# EAGLE board Proiect-TSC-brd_v37 (EAGLE 9.7.0)
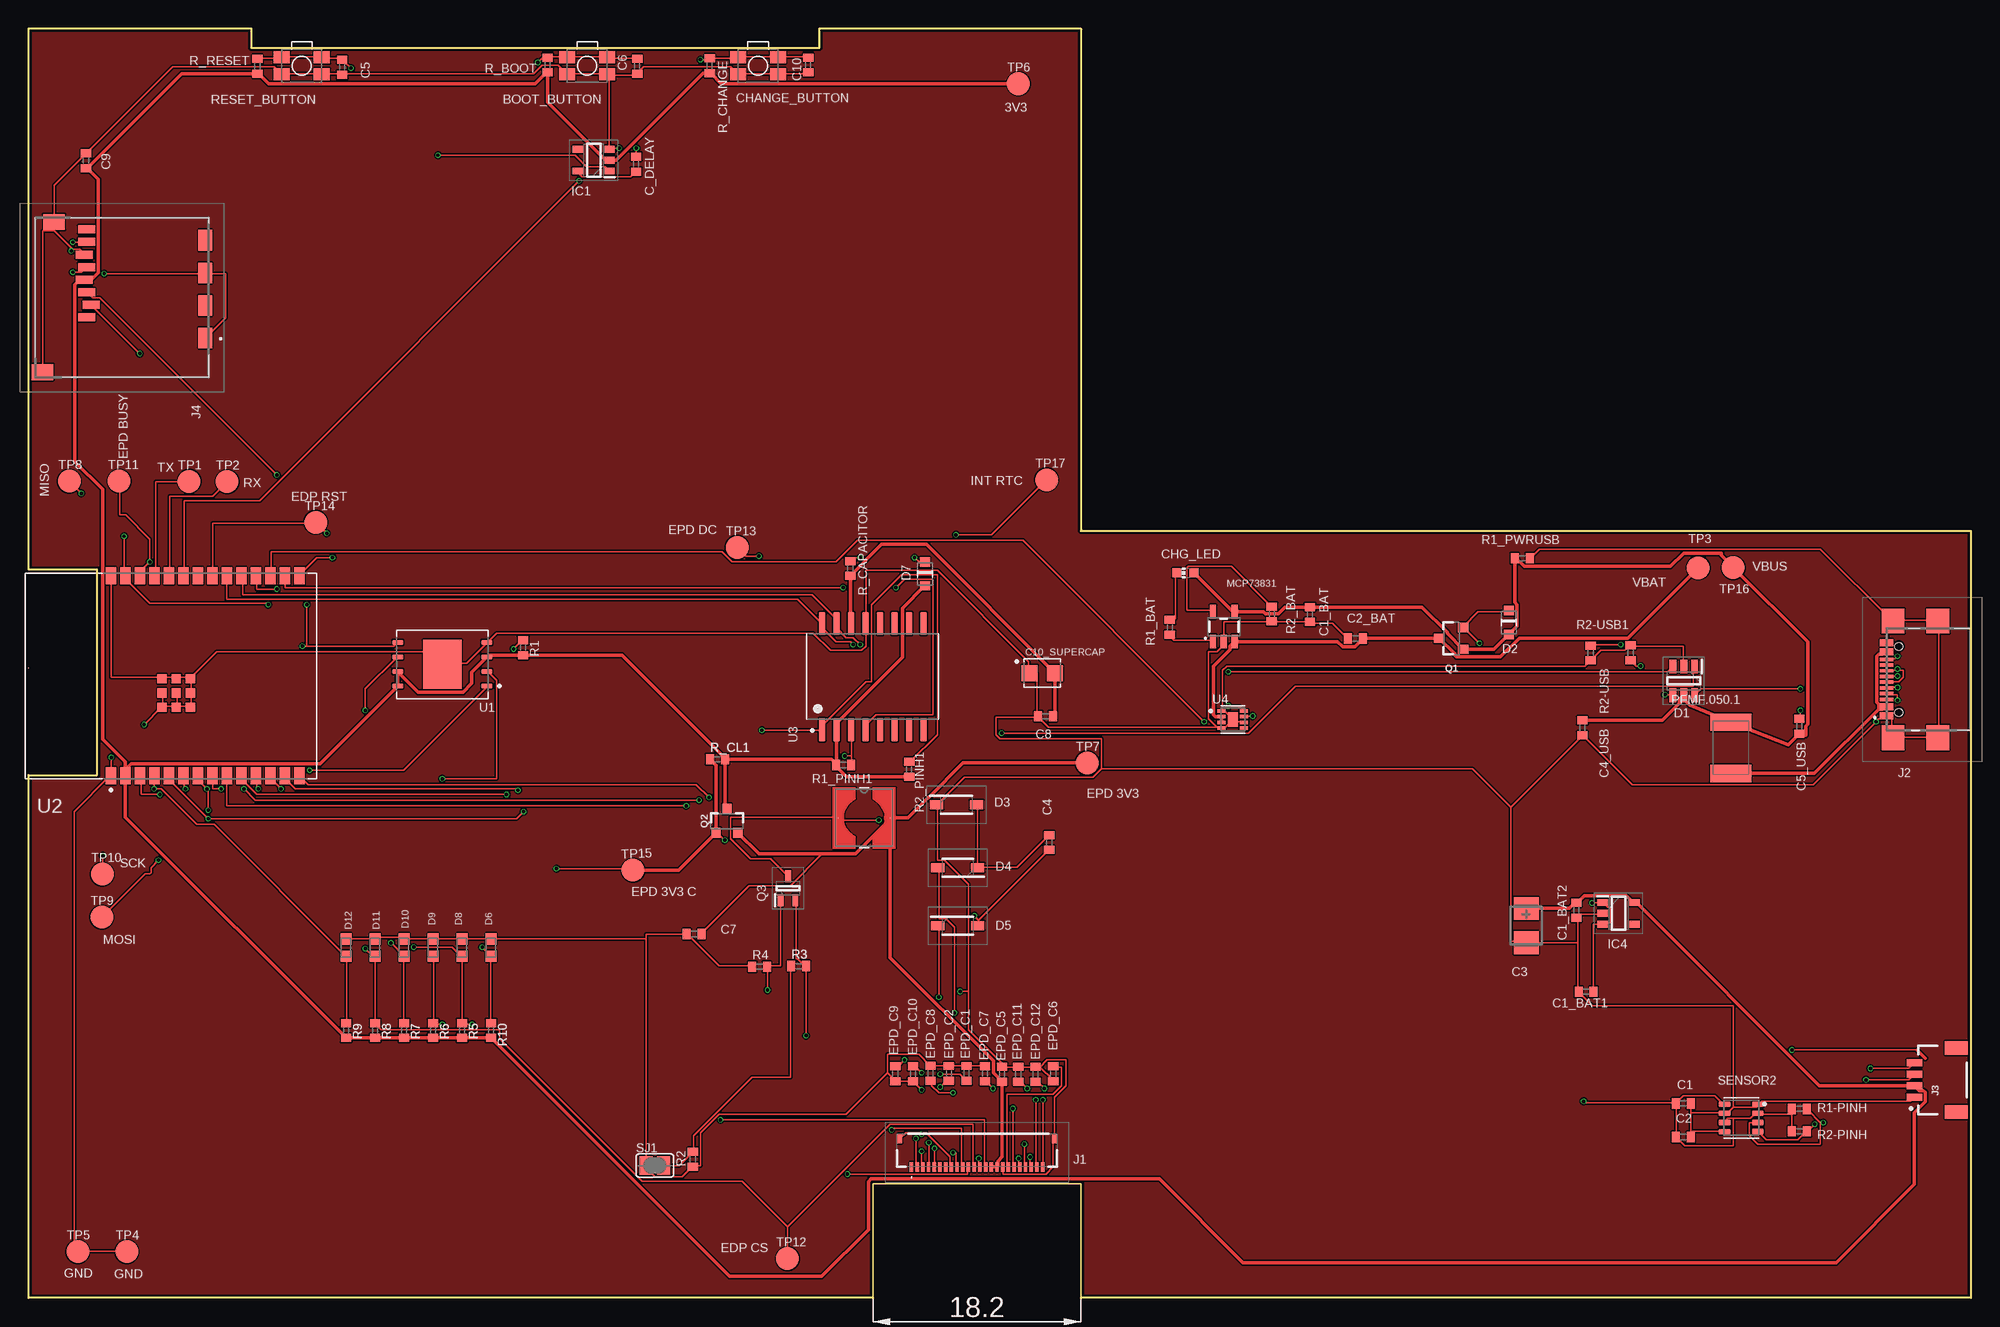
[diagram p0: board, top side]
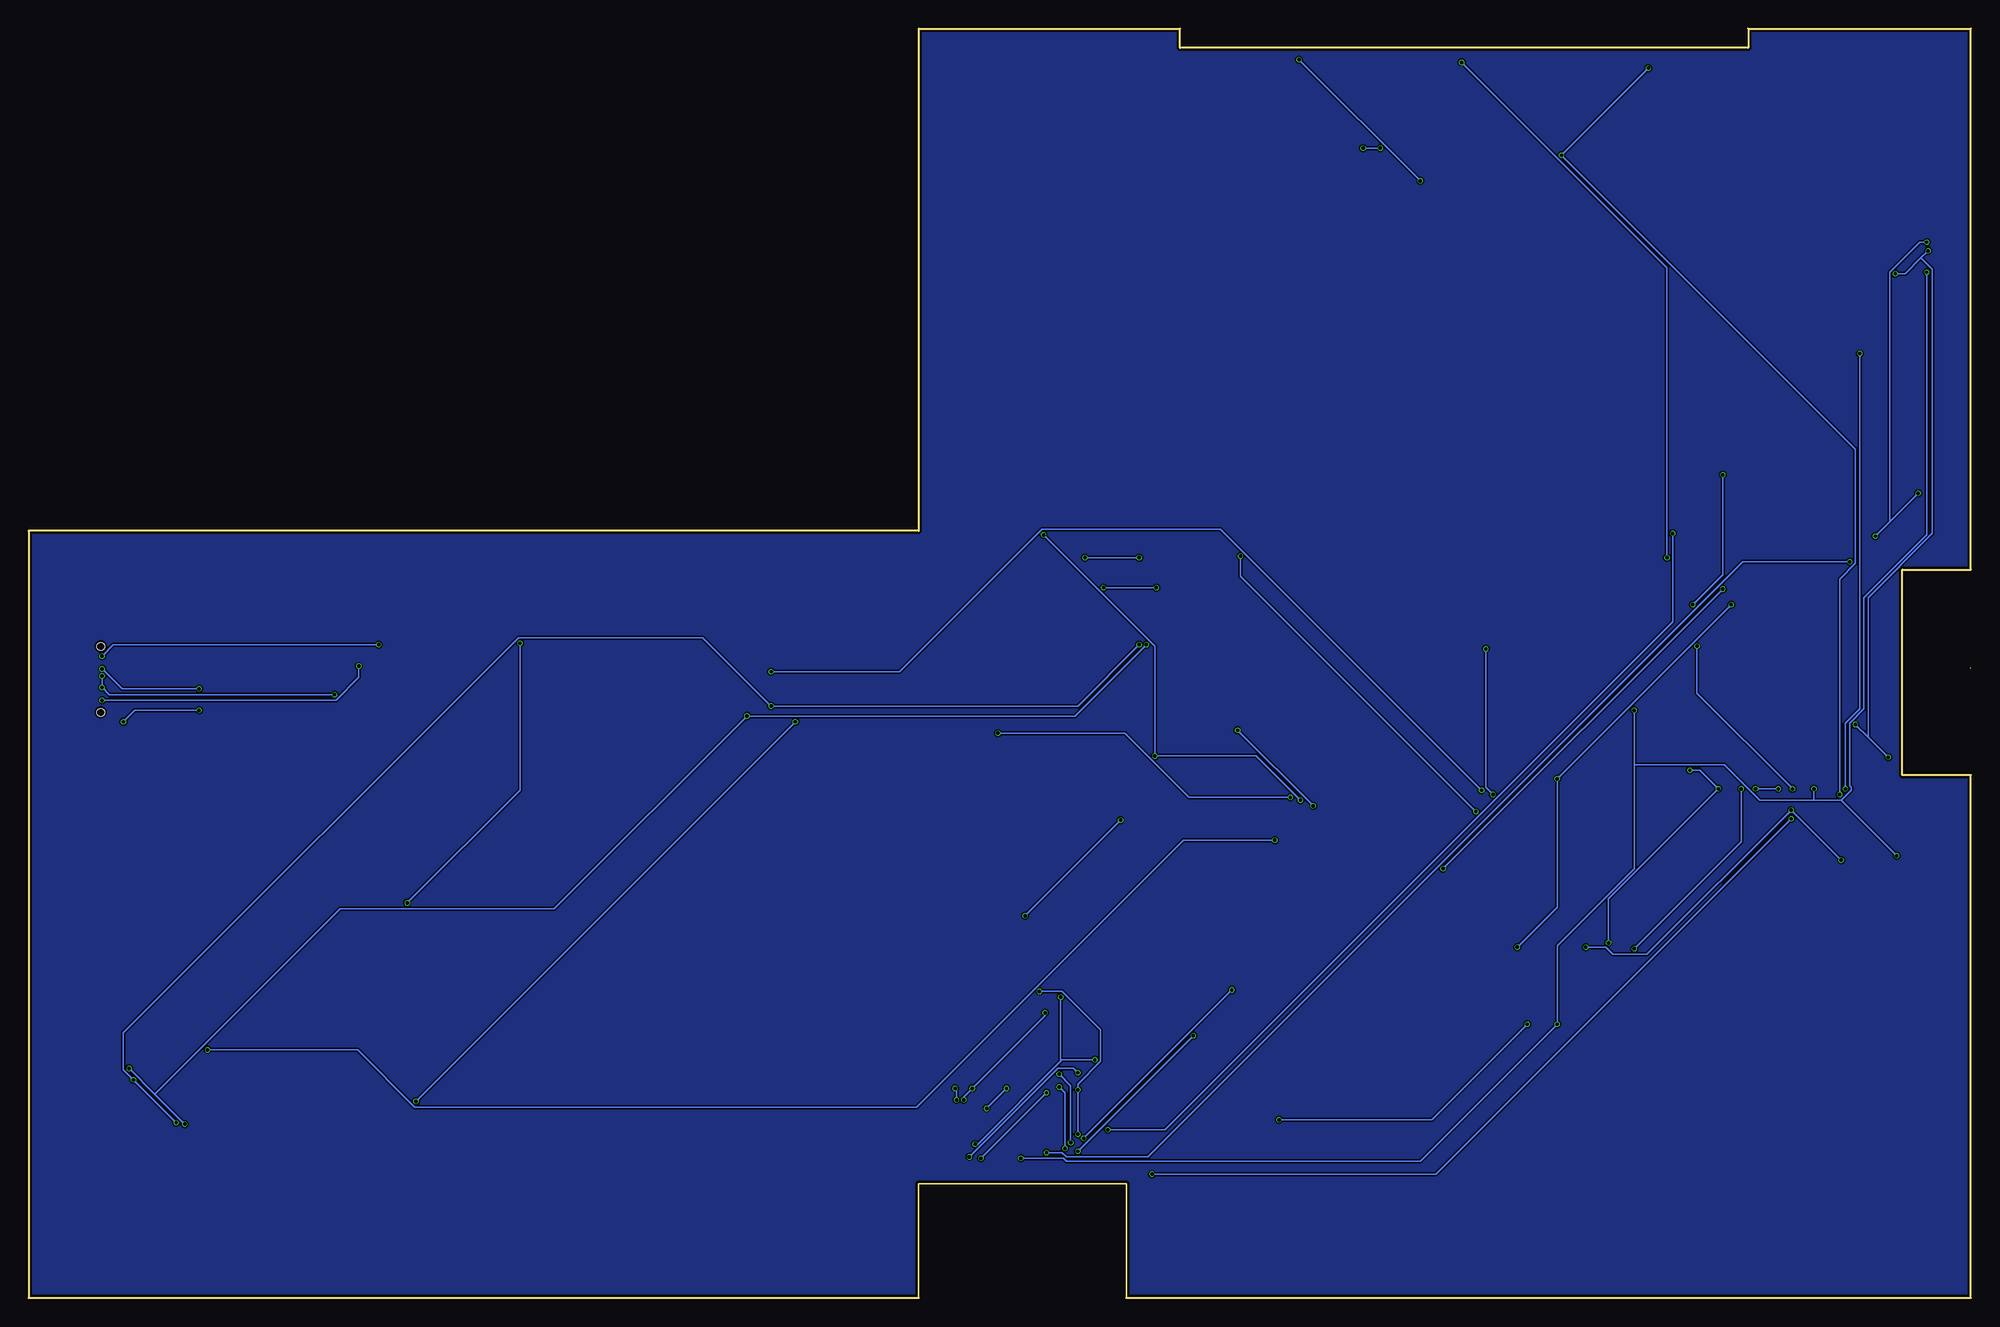
[diagram p1: board, bottom side, seen from below]

Size 170.2 x 111.2 mm. Coordinates in mm from the lower left corner, seen from the top.
Outline: 0,55.17 0,55.2
Outline: 19.51,111.2 0.01,111.2 0.01,63.8 6.01,63.8 6.01,45.8 0.01,45.8 0.01,0 74.01,0 74.01,10 92.21,10 92.21,0 170.2,0 170.2,67.2 92.2,67.2 92.2,111.2 69.31,111.2 69.31,109.5 19.51,109.5 19.51,111.2
Copper layers (1*16): Top 0.035mm / dielectric 1.6mm / Bottom 0.035mm
Design rules "jlcpcb-2layers.dru": minimum track width 5mil, minimum drill 0.3mm, track to track 5mil, track to pad 5mil, pad to pad 5mil, via to via 5mil, smd to smd 5mil, copper to edge 0.2mm, drill to drill 6mil, minimum pad ring 10mil, minimum via ring 3mil, stop-mask expansion 4mil, vias tented up to drill 0mil, thermal gap 10mil

## Footprints (pad centres in the part's own frame; a part is rotated, then mirrored left to right if it is on the bottom)
MYBUTTON = smd 1.4 x 1.05: 1 1.75,0.75; 2 -1.75,0.75; 3 -1.75,-0.75; 4 1.75,-0.75
EAGLE-LTSPICE_C0402 = smd 0.7 x 0.9: 1 -0.65,0; 2 0.65,0
ESP32_WROVER_EAGLE-LTSPICE_C0402 = smd 0.7 x 0.9: 1 -0.65,0; 2 0.65,0
RCL_CT3528 = smd 2 x 2.2: + -1.5,0; - 1.5,0
CAPCP3225X100N = smd 1.4 x 1.4: 1 -1.1,0; 2 1.1,0
ADAFRUIT_CHIP-LED0603 = smd 0.8 x 0.8: A 0,-0.75; C 0,0.75
SOT95P280X145-6N = smd 1.2 x 0.6: 1 -1.25,0.95; 2 -1.25,0; 3 -1.25,-0.95; 4 1.25,-0.95; 5 1.25,0; 6 1.25,0.95
ESP32_WROVER_AVX---SD0805S020S1R0_AVX_SD0805S020S1R0_0 = smd 0.8 x 0.9: 1 -1.05,0; 2 1.05,0
SOD3716X135N = smd 1.15 x 0.8: 1 -1.75,0; 2 1.75,0
DIOC1608X36N = smd 0.97 x 0.94: 1 -0.75,0; 2 0.75,0
SOT95P280X125-5N = smd 0.9 x 0.6: 1 -1.4,0.95; 2 -1.4,0; 3 -1.4,-0.95; 4 1.4,-0.95; 5 1.4,0.95
SOT95P280X120-5N = smd 0.9 x 0.6: 1 -1.4,0.95; 2 -1.4,0; 3 -1.4,-0.95; 4 1.4,-0.95; 5 1.4,0.95
FH34SRJ24S05SH99 = smd 0.3 x 0.8: 1 5.75,1.45; 2 5.25,1.45; 3 4.75,1.45; 4 4.25,1.45; 5 3.75,1.45; 6 3.25,1.45; 7 2.75,1.45; 8 2.25,1.45; 9 1.75,1.45; 10 1.25,1.45; 11 0.75,1.45; 12 0.25,1.45; 13 -0.25,1.45; 14 -0.75,1.45; 15 -1.25,1.45; 16 -1.75,1.45; 17 -2.25,1.45; 18 -2.75,1.45; 19 -3.25,1.45; 20 -3.75,1.45; 21 -4.25,1.45; 22 -4.75,1.45; 23 -5.25,1.45; 24 -5.75,1.45 | smd 0.4 x 0.8: MP1 6.75,-1.05; MP2 -6.75,-1.05
SAMACSYS_PARTS_USB4110GFA = smd 0.3 x 1.15: A1 -3.35,3.678; A4 -2.55,3.678; A5 -1.25,3.678; A6 -0.25,3.678; A7 0.25,3.678; A8 1.25,3.678; A9 2.55,3.678; A12 3.35,3.678; B1 3.05,3.678; B4 2.25,3.678; B5 1.75,3.678; B6 0.75,3.678; B7 -0.75,3.678; B8 -1.75,3.678; B9 -2.25,3.678; B12 -3.05,3.678 | smd 2.18 x 2: MP1 -5.11,-0.827; MP2 5.11,-0.827; MP3 -5.11,3.103; MP4 5.11,3.103 | hole 0.65: -2.89,2.603; 2.89,2.603
JST04_1MM_RA = smd 0.6 x 1.35: 1 -1.5,0; 2 -0.5,0; 3 0.5,0; 4 1.5,0 | smd 1.2 x 2: NC1 2.8,-3.675; NC2 -2.8,-3.675
112ATAARR03ATTEND = smd 1.8 x 1.2: G1 10.6,10.4; G2 4.9,10.4; S1 7.75,10.4; S2 2.05,10.4 | smd 1.4 x 1.9: G3 13.6,-3.85; G4 0.45,-2.85 | smd 0.7 x 1.5: P1 8.8,0; P2 7.7,0.4; P3 6.6,0; P4 5.5,-0.2; P5 4.4,0; P6 3.3,-0.2; P7 2.2,0; P8 1.1,0
IND_4828-WE-TPC_WRE = smd 0.127 x 0.127: 1 -2.286,0; 2 2.286,0
ESP32_WROVER_SPARKFUN-IC-POWER_SOT23-5 = smd 0.55 x 1.2: 1 -0.95,-1.3; 2 0,-1.3; 3 0.95,-1.3; 4 0.95,1.3; 5 -0.95,1.3
ESP32C6_VARISTOR_CT/CN1812 = smd 1.5 x 3.6: 1 -2.25,0; 2 2.25,0
ESP32_WROVER_SPARKFUN-DISCRETESEMI_SOT23-3 = smd 0.8 x 0.9: 1 -0.95,-1; 2 0.95,-1; 3 0,1.1
SOT65P210X110-3N = smd 1.05 x 0.5: 1 -1.05,0.65; 2 -1.05,-0.65; 3 1.05,0
ESP32_WROVER_EAGLE-LTSPICE_R0402 = smd 0.7 x 0.9: 1 -0.65,0; 2 0.65,0
ESP32_WROVER_BME680_PSON80P300X300X100-8N = smd 1.016 x 0.5: 1 1.458,1.2; 2 1.458,0.4; 3 1.458,-0.4; 4 1.458,-1.2; 5 -1.458,-1.22; 6 -1.458,-0.4; 7 -1.458,0.4; 8 -1.458,1.2
SJ = smd 1.168 x 1.6: 1 -0.762,0; 2 0.762,0
TP20R = smd 2 x 2: TP 0,0
SON127P600X800X80-9N = smd 0.94 x 0.44: 1 -3.895,1.905; 2 -3.895,0.635; 3 -3.895,-0.635; 4 -3.895,-1.905; 5 3.895,-1.905; 6 3.895,-0.635; 7 3.895,0.635; 8 3.895,1.905 | smd 3.4 x 4.3: 9 0,0
XCVR_ESP32-C6-WROOM-1-N8 = smd 1.5 x 0.9: 1 -8.75,5.26; 2 -8.75,3.99; 3 -8.75,2.72; 4 -8.75,1.45; 5 -8.75,0.18; 6 -8.75,-1.09; 7 -8.75,-2.36; 8 -8.75,-3.63; 9 -8.75,-4.9; 10 -8.75,-6.17; 11 -8.75,-7.44; 12 -8.75,-8.71; 13 -8.75,-9.98; 14 -8.75,-11.25; 15 8.75,-11.25; 16 8.75,-9.98; 17 8.75,-8.71; 18 8.75,-7.44; 19 8.75,-6.17; 20 8.75,-4.9; 21 8.75,-3.63; 22 8.75,-2.36; 23 8.75,-1.09; 24 8.75,0.18; 25 8.75,1.45; 26 8.75,2.72; 27 8.75,3.99; 28 8.75,5.26 | smd 0.8 x 0.8: 29_1 -2.755,0.79; 29_2 -1.505,0.79; 29_3 -0.255,0.79; 29_4 -2.755,-0.46; 29_5 -1.505,-0.46; 29_6 -0.255,-0.46; 29_7 -2.755,-1.71; 29_8 -1.505,-1.71; 29_9 -0.255,-1.71
SOIC127P1032X265-16N = smd 2.05 x 0.59: 1 -4.655,4.445; 2 -4.655,3.175; 3 -4.655,1.905; 4 -4.655,0.635; 5 -4.655,-0.635; 6 -4.655,-1.905; 7 -4.655,-3.175; 8 -4.655,-4.445; 9 4.655,-4.445; 10 4.655,-3.175; 11 4.655,-1.905; 12 4.655,-0.635; 13 4.655,0.635; 14 4.655,1.905; 15 4.655,3.175; 16 4.655,4.445
SON50P200X200X80-9N = smd 0.76 x 0.27: 1 -0.985,0.75; 2 -0.985,0.25; 3 -0.985,-0.25; 4 -0.985,-0.75; 5 0.985,-0.75; 6 0.985,-0.25; 7 0.985,0.25; 8 0.985,0.75 | smd 0.9 x 1.3: 9 0,0

## Placement (x,y rotation side)
BOOT_BUTTON  BUTTON_CUSYOMV1  [MYBUTTON]  48.95,107.95 180 top
C1  100nF  [EAGLE-LTSPICE_C0402]  144.99,17.04 0 top
C1_BAT  4.7uF  [EAGLE-LTSPICE_C0402]  112.28,59.87 270 top
C1_BAT1  4.7uF  [ESP32_WROVER_EAGLE-LTSPICE_C0402]  136.48,26.83 180 top
C1_BAT2  4.7uF  [EAGLE-LTSPICE_C0402]  135.61,33.97 270 top
C2  100nF  [EAGLE-LTSPICE_C0402]  144.99,14.1 0 top
C2_BAT  4.7uF  [EAGLE-LTSPICE_C0402]  116.28,57.77 180 top
C3  100uF  [RCL_CT3528]  131.23,32.62 270 top
C4  4.7uF/25V  [EAGLE-LTSPICE_C0402]  89.44,39.9 270 top
C4_USB  100nF  [EAGLE-LTSPICE_C0402]  136.16,49.94 270 top
C5  1uF  [EAGLE-LTSPICE_C0402]  27.48,107.82 270 top
C5_USB  4.7uF  [EAGLE-LTSPICE_C0402]  155.16,50.08 90 top
C6  100nF  [EAGLE-LTSPICE_C0402]  53.34,107.9 270 top
C7  10uF  [EAGLE-LTSPICE_C0402]  58.32,31.88 180 top
C8  100nF  [EAGLE-LTSPICE_C0402]  89.11,50.96 180 top
C9  100nF  [EAGLE-LTSPICE_C0402]  5.04,99.62 270 top
C10  100nF  [EAGLE-LTSPICE_C0402]  68.32,108 270 top
C10_SUPERCAP  CPH3225A  [CAPCP3225X100N]  88.83,54.74 0 top
C_DELAY  100nF  [EAGLE-LTSPICE_C0402]  53.24,99.32 90 top
CHANGE_BUTTON  BUTTON_CUSYOMV1  [MYBUTTON]  63.92,107.93 180 top
CHG_LED  [ADAFRUIT_CHIP-LED0603]  101.38,63.51 90 top
D1  USBLC6-2SC6Y  [SOT95P280X145-6N]  145.04,54.05 270 top
D2  ESP32_WROVER_AVX---SD0805S020S1R0_AVX_SD0805S020S1R0_0_0AVX_SD0805S020S1R0_0_0  [ESP32_WROVER_AVX---SD0805S020S1R0_AVX_SD0805S020S1R0_0]  129.7,59.17 270 top
D3  MBR0530  [SOD3716X135N]  81.32,43.2 0 top
D4  MBR0530  [SOD3716X135N]  81.42,37.69 180 top
D5  MBR0530  [SOD3716X135N]  81.42,32.61 0 top
D6  PGB1010603MR  [DIOC1608X36N]  40.53,30.69 270 top
D7  ESP32_WROVER_AVX---SD0805S020S1R0_AVX_SD0805S020S1R0_0_0AVX_SD0805S020S1R0_0_0  [ESP32_WROVER_AVX---SD0805S020S1R0_AVX_SD0805S020S1R0_0]  78.56,63.42 270 top
D8  PGB1010603MR  [DIOC1608X36N]  37.99,30.69 270 top
D9  PGB1010603MR  [DIOC1608X36N]  35.45,30.69 270 top
D10  PGB1010603MR  [DIOC1608X36N]  32.91,30.69 270 top
D11  PGB1010603MR  [DIOC1608X36N]  30.37,30.69 270 top
D12  PGB1010603MR  [DIOC1608X36N]  27.83,30.69 270 top
EPD_C1  1uF/50V  [EAGLE-LTSPICE_C0402]  82.19,19.67 270 top
EPD_C2  1uF/50V  [EAGLE-LTSPICE_C0402]  80.64,19.67 270 top
EPD_C5  1uF/50V  [EAGLE-LTSPICE_C0402]  85.31,19.6 270 top
EPD_C6  1uF/50V  [EAGLE-LTSPICE_C0402]  89.79,19.63 90 top
EPD_C7  1uF/50V  [EAGLE-LTSPICE_C0402]  83.81,19.65 270 top
EPD_C8  1uF/50V  [EAGLE-LTSPICE_C0402]  79.03,19.68 270 top
EPD_C9  1uF/50V  [EAGLE-LTSPICE_C0402]  75.94,19.63 90 top
EPD_C10  1uF/50V  [EAGLE-LTSPICE_C0402]  77.5,19.63 90 top
EPD_C11  1uF/50V  [EAGLE-LTSPICE_C0402]  86.72,19.6 270 top
EPD_C12  1uF/50V  [EAGLE-LTSPICE_C0402]  88.23,19.6 270 top
IC1  BD5229G-TR  [SOT95P280X125-5N]  49.52,99.68 180 top
IC4  XC6220A331MR-G  [SOT95P280X120-5N]  139.32,33.69 0 top
J1  FH34SRJ-24S-0.5SH_99_  [FH34SRJ24S05SH99]  83.11,12.92 180 top
J2  SAMACSYS_PARTS_USB4110-GF-A  [SAMACSYS_PARTS_USB4110GFA]  166.48,54.19 90 top
J3  QWIIC_RIGHT_ANGLE  [JST04_1MM_RA]  165.25,19.09 90 top
J4  112A-TAAR-R03_ATTEND  [112ATAARR03ATTEND]  5.08,94.7 270 top
L1  68uH  [IND_4828-WE-TPC_WRE]  73.22,42.05 0 top
MCP73831  ESP32_WROVER_SPARKFUN-IC-POWER_MCP73831  [ESP32_WROVER_SPARKFUN-IC-POWER_SOT23-5]  104.73,58.8 0 top
PFMF.050.1  ESP32C6_VARISTORCN1812  [ESP32C6_VARISTOR_CT/CN1812]  149.16,48.19 90 top
Q1  20V/4.2A/52mΩ/1.4W  [ESP32_WROVER_SPARKFUN-DISCRETESEMI_SOT23-3]  124.69,57.79 90 top
Q2  20V/4.2A/52mΩ/1.4W  [ESP32_WROVER_SPARKFUN-DISCRETESEMI_SOT23-3]  61.2,41.75 0 top
Q3  SI1308EDL-T1-GE3  [SOT65P210X110-3N]  66.55,35.89 90 top
R1  10K  [ESP32_WROVER_EAGLE-LTSPICE_R0402]  43.34,56.96 270 top
R1-PINH  10K  [ESP32_WROVER_EAGLE-LTSPICE_R0402]  155.17,16.56 180 top
R1_BAT  200  [ESP32_WROVER_EAGLE-LTSPICE_R0402]  100,58.75 270 top
R1_PINH1  10K  [ESP32_WROVER_EAGLE-LTSPICE_R0402]  71.41,46.68 180 top
R1_PWRUSB  100K  [ESP32_WROVER_EAGLE-LTSPICE_R0402]  130.88,64.8 180 top
R2  2.2  [ESP32_WROVER_EAGLE-LTSPICE_R0402]  58.21,12.16 90 top
R2-PINH  10K  [ESP32_WROVER_EAGLE-LTSPICE_R0402]  155.17,14.6 180 top
R2-USB  5k1  [ESP32_WROVER_EAGLE-LTSPICE_R0402]  136.87,56.5 270 top
R2-USB1  5K1  [ESP32_WROVER_EAGLE-LTSPICE_R0402]  140.37,56.52 270 top
R2_BAT  2K  [ESP32_WROVER_EAGLE-LTSPICE_R0402]  108.94,59.91 90 top
R2_PINH1  10K  [ESP32_WROVER_EAGLE-LTSPICE_R0402]  77.17,46.3 270 top
R3  0.47  [ESP32_WROVER_EAGLE-LTSPICE_R0402]  67.48,29.07 0 top
R4  10K  [ESP32_WROVER_EAGLE-LTSPICE_R0402]  64.05,29.02 0 top
R5  10K  [ESP32_WROVER_EAGLE-LTSPICE_R0402]  37.99,23.43 270 top
R6  10K  [ESP32_WROVER_EAGLE-LTSPICE_R0402]  35.45,23.43 270 top
R7  10K  [ESP32_WROVER_EAGLE-LTSPICE_R0402]  32.91,23.43 270 top
R8  10K  [ESP32_WROVER_EAGLE-LTSPICE_R0402]  30.37,23.43 270 top
R9  10K  [ESP32_WROVER_EAGLE-LTSPICE_R0402]  27.83,23.43 270 top
R10  10K  [ESP32_WROVER_EAGLE-LTSPICE_R0402]  40.53,23.43 270 top
R_BOOT  10K  [ESP32_WROVER_EAGLE-LTSPICE_R0402]  45.49,108 270 top
R_CAPACITOR  15  [ESP32_WROVER_EAGLE-LTSPICE_R0402]  72.01,63.9 270 top
R_CHANGE  10K  [ESP32_WROVER_EAGLE-LTSPICE_R0402]  59.69,107.93 270 top
R_CL1  10K  [ESP32_WROVER_EAGLE-LTSPICE_R0402]  60.36,47.19 0 top
R_RESET  10K  [ESP32_WROVER_EAGLE-LTSPICE_R0402]  20.06,107.89 270 top
RESET_BUTTON  BUTTON_CUSYOMV1  [MYBUTTON]  23.94,107.93 180 top
SENSOR2  BME688  [ESP32_WROVER_BME680_PSON80P300X300X100-8N]  150.07,15.77 0 top
SJ1  [SJ]  54.88,11.6 0 top
TP1  TPTP20R  [TP20R]  14.06,71.53 0 top
TP2  TPTP20R  [TP20R]  17.39,71.51 0 top
TP3  TPTP20R  [TP20R]  146.31,63.96 0 top
TP4  TPTP20R  [TP20R]  8.62,4.06 0 top
TP5  TPTP20R  [TP20R]  4.33,4.06 0 top
TP6  TPTP20R  [TP20R]  86.74,106.36 0 top
TP7  TPTP20R  [TP20R]  92.75,46.86 0 top
TP8  TPTP20R  [TP20R]  3.59,71.55 0 top
TP9  TPTP20R  [TP20R]  6.42,33.35 0 top
TP10  TPTP20R  [TP20R]  6.47,37.13 0 top
TP11  TPTP20R  [TP20R]  7.93,71.55 0 top
TP12  TPTP20R  [TP20R]  66.5,3.45 0 top
TP13  TPTP20R  [TP20R]  62.09,65.74 0 top
TP14  TPTP20R  [TP20R]  25.17,67.94 0 top
TP15  TPTP20R  [TP20R]  52.95,37.47 2.4 top
TP16  TPTP20R  [TP20R]  149.37,63.98 270 top
TP17  TPTP20R  [TP20R]  89.2,71.67 0 top
U1  W25Q512JVEIQ  [SON127P600X800X80-9N]  36.26,55.5 180 top
U2  ESP32-C6-WROOM-1-N8  [XCVR_ESP32-C6-WROOM-1-N8]  12.48,54.5 90 top
U3  DS3231SN#  [SOIC127P1032X265-16N]  73.96,54.42 90 top
U4  MAX17048G+T10  [SON50P200X200X80-9N]  105.53,50.67 0 top

## Library data of the parts
BOOT_BUTTON CHANGE_BUTTON CHG_LED PFMF.050.1 RESET_BUTTON SJ1 TP1-TP17 = DeskAssistant+v19+v1
C1 C1_BAT C1_BAT1 C1_BAT2 C2 C2_BAT C4 C4_USB C5 C5_USB C6-C10 C_DELAY EPD_C1 EPD_C2 EPD_C5-EPD_C12 = DeskAssistant+v19+v1; SPICEMODEL: NONE; SPICEPREFIX: C
C3 = DeskAssistant+v19+v1; SPICEPREFIX: C
C10_SUPERCAP = DeskAssistant+v19+v1; AVAILABILITY: Not in stock; CHECK_PRICES: https://www.snapeda.com/parts/CPH3225A/Seiko+Instruments/view-part/?ref=eda; DESCRIPTION: 11 mF (EDLC) Supercapacitor 3.3 V 1210 (3225 Metric) - -; MF: Seiko Instruments; MP: CPH3225A; PACKAGE: 1210 Seiko; PRICE: None; PURCHASE-URL: https://www.snapeda.com/api/url_track_click_mouser/?unipart_id=562593&manufacturer=Seiko Instruments&part_name=CPH3225A&search_term=None; SNAPEDA_LINK: https://www.snapeda.com/parts/CPH3225A/Seiko+Instruments/view-part/?ref=snap
D1 = DeskAssistant+v19+v1; AVAILABILITY: In Stock; CHECK_PRICES: https://www.snapeda.com/parts/USBLC6-2SC6Y/STMicroelectronics/view-part/?ref=eda; DESCRIPTION: 17V Clamp 5A (8/20µs) Ipp Tvs Diode Surface Mount SOT-23-6; MF: STMicroelectronics; MP: USBLC6-2SC6Y; PACKAGE: SOT-23-6 STMicroelectronics; PRICE: None; SNAPEDA_LINK: https://www.snapeda.com/parts/USBLC6-2SC6Y/STMicroelectronics/view-part/?ref=snap
D2 D7 = DeskAssistant+v19+v1; CENTROID_NOT_SPECIFIED: No; DATASHEET: http://datasheets.avx.com/schottky.pdf; DIGIKEY_DESCRIPTION: DIODE SCHOTTKY 20V 1A 0805; DIGIKEY_PART_NUMBER: 478-7800-1-ND; LEAD_FREE: yes; MF: AVX; MOUSER_PART_NUMBER: 581-SD0805S020S1R0; PACKAGE: 0805 (2012 metric); PREFIX: D; ROHS: yes; TEMPERATURE_RANGE_HIGH: +125°C; TEMPERATURE_RANGE_LOW: -55°C
D3-D5 = DeskAssistant+v19+v1; AVAILABILITY: In Stock; CHECK_PRICES: https://www.snapeda.com/parts/MBR0530/Onsemi/view-part/?ref=eda; DESCRIPTION: Diode Schottky 30 V 500mA Surface Mount SOD-123; MF: ON Semiconductor; MP: MBR0530; PACKAGE: SOD-123-2 ON Semiconductor; PRICE: None; PURCHASE-URL: https://www.snapeda.com/api/url_track_click_mouser/?unipart_id=179458&manufacturer=ON Semiconductor&part_name=MBR0530&search_term=None; SNAPEDA_LINK: https://www.snapeda.com/parts/MBR0530/Onsemi/view-part/?ref=snap
D6 D8-D12 = DeskAssistant+v19+v1; AVAILABILITY: In Stock; CHECK_PRICES: https://www.snapeda.com/parts/PGB1010603MR/Littelfuse/view-part/?ref=eda; DESCRIPTION: 150V (Typ) Clamp - Ipp Tvs Diode Surface Mount 0603 (1608 Metric); MF: Littelfuse Inc.; MP: PGB1010603MR; PACKAGE: 0603 Littelfuse Inc.; PRICE: None; PURCHASE-URL: https://www.snapeda.com/api/url_track_click_mouser/?unipart_id=5659453&manufacturer=Littelfuse Inc.&part_name=PGB1010603MR&search_term=None; SNAPEDA_LINK: https://www.snapeda.com/parts/PGB1010603MR/Littelfuse/view-part/?ref=snap
IC1 = DeskAssistant+v19+v1; DESCRIPTION: Voltage Detector with Adjustable Delay Time: CMOS processes are utilized to develop high precision, low current consumption CMOS reset ICs that allow arbitrary setting of the delay time. The extensive lineup includes both Nch Open Drain and CMOS output types in a wide range of detection voltages (from 2.3V to 6.0V, in 0.1V steps), enabling selection of the ideal solution based on customer requirements. In addition, the entire series is of course both lead-free and RoHS-compliant.; HEIGHT: 1.25mm; MANUFACTURER_NAME: ROHM Semiconductor; MANUFACTURER_PART_NUMBER: BD5229G-TR; MOUSER_PART_NUMBER: 755-BD5229G-TR; MOUSER_PRICE-STOCK: https://www.mouser.co.uk/ProductDetail/ROHM-Semiconductor/BD5229G-TR?qs=4kLU8WoGk0vvnhrrYwdszw%3D%3D
IC4 = DeskAssistant+v19+v1; DESCRIPTION: LDO Voltage Regulators; HEIGHT: 1.2mm; MANUFACTURER_NAME: Torex; MANUFACTURER_PART_NUMBER: XC6220A331MR-G; MOUSER_PART_NUMBER: 865-XC6220A331MR-G; MOUSER_PRICE-STOCK: https://www.mouser.co.uk/ProductDetail/Torex-Semiconductor/XC6220A331MR-G?qs=AsjdqWjXhJ8ZSWznL1J0gg%3D%3D
J1 = DeskAssistant+v19+v1; DESCRIPTION: 24 Position FFC, FPC Connector Contacts, Top and Bottom 0.020" (0.50mm) Surface Mount, Right Angle; HEIGHT: 1.1mm; MANUFACTURER_NAME: Hirose; MANUFACTURER_PART_NUMBER: FH34SRJ-24S-0.5SH(99); MOUSER_PART_NUMBER: 798-FH34SRJ24S05SH99; MOUSER_PRICE-STOCK: https://www.mouser.co.uk/ProductDetail/Hirose-Connector/FH34SRJ-24S-0.5SH99?qs=vcbW%252B4%252BSTIpKBl5ap9J8Fw%3D%3D
J2 = DeskAssistant+v19+v1; DESCRIPTION: CONN USB 2.0 TYPE-C R/A SMT; HEIGHT: 3.26mm; MANUFACTURER_NAME: GCT (GLOBAL CONNECTOR TECHNOLOGY); MANUFACTURER_PART_NUMBER: USB4110-GF-A; MOUSER_PART_NUMBER: 640-USB4110-GF-A; MOUSER_PRICE-STOCK: https://www.mouser.co.uk/ProductDetail/GCT/USB4110-GF-A?qs=KUoIvG%2F9IlYiZvIXQjyJeA%3D%3D
J3 = DeskAssistant+v19+v1; PROD_ID: CONN-13694
J4 = DeskAssistant+v19+v1; DESCRIPTION: Micro SD Card Socket, Push-Push Type, Top Mount, SMT, H=1.83mm, 10u; HEIGHT: 1.9mm; MANUFACTURER_NAME: ATTEND; MANUFACTURER_PART_NUMBER: 112A-TAAR-R03 ATTEND
L1 = DeskAssistant+v19+v1; COPYRIGHT: Copyright (C) 2024 Ultra Librarian. All rights reserved.; MANUFACTURER_PART_NUMBER: 744043680; MFR_NAME: Wurth Electronics
MCP73831 = DeskAssistant+v19+v1; PROD_ID: IC-09995
Q1 Q2 = DeskAssistant+v19+v1; PROD_ID: TRAN-14388
Q3 = DeskAssistant+v19+v1; AVAILABILITY: In Stock; CHECK_PRICES: https://www.snapeda.com/parts/SI1308EDL-T1-GE3/Vishay+Siliconix/view-part/?ref=eda; DESCRIPTION: Si1308EDL-T1-GE3 N-channel MOSFET Transistor, 1.5 A, 30 V, 3-Pin SC-70 | Siliconix / Vishay SI1308EDL-T1-GE3; MF: Vishay Siliconix; MP: SI1308EDL-T1-GE3; PACKAGE: SOT-323 Vishay Semiconductor; PRICE: None; PURCHASE-URL: https://www.snapeda.com/api/url_track_click_mouser/?unipart_id=274603&manufacturer=Vishay Siliconix&part_name=SI1308EDL-T1-GE3&search_term=None; SNAPEDA_LINK: https://www.snapeda.com/parts/SI1308EDL-T1-GE3/Vishay+Siliconix/view-part/?ref=snap
R1 R1-PINH R1_BAT R1_PINH1 R1_PWRUSB R2 R2-PINH R2-USB R2-USB1 R2_BAT R2_PINH1 R3-R10 R_BOOT R_CAPACITOR R_CHANGE R_CL1 R_RESET = DeskAssistant+v19+v1; SPICEMODEL: NONE; SPICEPREFIX: R
SENSOR2 = DeskAssistant+v19+v1; AVAILABILITY: Unavailable; DESCRIPTION: Integrated Environmental Unit; MF: Bosch Sensortec; MP: BME680; PACKAGE: LGA-8 Bosch Tools; PRICE: None
U1 = DeskAssistant+v19+v1; AVAILABILITY: In Stock; CHECK_PRICES: https://www.snapeda.com/parts/W25Q512JVEIQ/Winbond+Electronics/view-part/?ref=eda; DESCRIPTION: FLASH - NOR Memory IC 512Mb (64M x 8) SPI - Quad I/O 133 MHz 8-WSON (8x6); MF: Winbond Electronics; MP: W25Q512JVEIQ; PACKAGE: Package; PRICE: None; SNAPEDA_LINK: https://www.snapeda.com/parts/W25Q512JVEIQ/Winbond+Electronics/view-part/?ref=snap
U2 = DeskAssistant+v19+v1; AVAILABILITY: In Stock; CHECK_PRICES: https://www.snapeda.com/parts/ESP32-C6-WROOM-1-N8/Espressif+Systems/view-part/?ref=eda; DESCRIPTION: Multiprotocol Modules ESP32-C6 module, Wi-Fi 6 in 2.4 GHz band, Bluetooth 5, Zigbee 3.0 and Thread. ESP34-WROOM Compatible - ENGINEERING SAMPLE; MF: Espressif Systems; MP: ESP32-C6-WROOM-1-N8; PACKAGE: None; PRICE: None; SNAPEDA_LINK: https://www.snapeda.com/parts/ESP32-C6-WROOM-1-N8/Espressif+Systems/view-part/?ref=snap
U3 = DeskAssistant+v19+v1; AVAILABILITY: In Stock; CHECK_PRICES: https://www.snapeda.com/parts/DS3231SN%23/Analog+Devices/view-part/?ref=eda; DESCRIPTION: Extremely Accurate I²C-Integrated RTC/TCXO/Crystal; MF: Analog Devices; MP: DS3231SN#; PACKAGE: SOIC-16 Maxim; PRICE: None; PURCHASE-URL: https://www.snapeda.com/api/url_track_click_mouser/?unipart_id=99048&manufacturer=Analog Devices&part_name=DS3231SN#&search_term=None; SNAPEDA_LINK: https://www.snapeda.com/parts/DS3231SN%23/Analog+Devices/view-part/?ref=snap
U4 = DeskAssistant+v19+v1; AVAILABILITY: In Stock; CHECK_PRICES: https://www.snapeda.com/parts/MAX17048G+T10/Analog+Devices/view-part/?ref=eda; DESCRIPTION: 3µA 1-Cell/2-Cell Fuel Gauge with ModelGauge; MF: Analog Devices; MP: MAX17048G+T10; PACKAGE: TDFN-8 Maxim; PRICE: None; PURCHASE-URL: https://www.snapeda.com/api/url_track_click_mouser/?unipart_id=329239&manufacturer=Analog Devices&part_name=MAX17048G+T10&search_term=None; SNAPEDA_LINK: https://www.snapeda.com/parts/MAX17048G+T10/Analog+Devices/view-part/?ref=snap

## Nets
3V3 [POWER]: C1_BAT2.1 C3.+ C9.2 D7.2 IC1.2 IC4.5 J3.2 J4.P4 Q2.3 R1.2 R1_PINH1.2 R2_PINH1.2 R5.2 R6.2 R7.2 R8.2 R9.2 R10.2 R_BOOT.2 R_CHANGE.2 R_CL1.2 R_RESET.2 TP6.TP U1.3 U1.7 U1.8 U2.2 U3.2
32KHZ: R2_PINH1.1 U2.9 U3.1
DN: D1.4 J2.A7 J2.B7
DP: D1.6 J2.A6 J2.B6
EPD_3V3 [POWER]: C7.1 EPD_C5.2 J1.15 J1.16 L1.2 Q2.2 TP7.TP
EPD_3V3_C [POWER]: Q2.1 R_CL1.1 TP15.TP U2.18
EPD_BUSY: J1.9 TP11.TP U2.26
EPD_CS: D11.2 J1.12 R8.1 TP12.TP U2.11
EPD_DC: J1.11 TP13.TP U2.5
EPD_RST: J1.10 TP14.TP U2.21
FLASH_CS: D10.2 R7.1 U1.1 U2.12
GDR: J1.2 Q3.1 R4.2
GND: BOOT_BUTTON.1 BOOT_BUTTON.2 C1.2 C1_BAT1.2 C1_BAT2.2 C1_BAT.2 C2.2 C2_BAT.2 C3.- C4_USB.2 C5.2 C5_USB.2 C6.2 C7.2 C8.2 C9.1 C10.2 C10_SUPERCAP.1 C_DELAY.2 CHANGE_BUTTON.1 CHANGE_BUTTON.2 D1.2 D3.1 D6.1 D8.1 D9.1 D10.1 D11.1 D12.1 EPD_C1.1 EPD_C2.1 EPD_C5.1 EPD_C6.1 EPD_C7.1 EPD_C8.1 EPD_C9.1 EPD_C10.1 EPD_C11.1 EPD_C12.1 IC1.3 IC4.2 J1.8 J1.17 J1.MP1 J1.MP2 J2.A1 J2.A12 J2.B1 J2.B12 J2.MP1 J2.MP2 J2.MP3 J2.MP4 J3.1 J4.G1 J4.G2 J4.G3 J4.G4 J4.P6 MCP73831.2 R1_PWRUSB.1 R2-USB1.1 R2-USB.2 R2.1 R2_BAT.1 R4.1 RESET_BUTTON.1 RESET_BUTTON.2 SENSOR2.1 SENSOR2.5 SENSOR2.7 SJ1.1 TP4.TP TP5.TP U1.4 U1.9 U2.1 U2.28 U2.29_1 U2.29_2 U2.29_3 U2.29_4 U2.29_5 U2.29_6 U2.29_7 U2.29_8 U2.29_9 U3.13 U4.1 U4.4 U4.6 U4.9
GPIO8: R1.1 U2.10
I2C_PW: C1.1 C2.1 R1-PINH.2 R2-PINH.2 SENSOR2.2 SENSOR2.6 SENSOR2.8 U2.17
INT_RTC: R1_PINH1.1 TP17.TP U2.8 U3.3
IO/BOOT: BOOT_BUTTON.3 BOOT_BUTTON.4 C6.1 R_BOOT.1 U2.15
IO/CHANGE: C10.1 CHANGE_BUTTON.3 CHANGE_BUTTON.4 R_CHANGE.1 U2.23
MISO: D6.2 J4.P7 R10.1 TP8.TP U1.2 U2.27
MOSI: D8.2 J1.14 J4.P3 R5.1 TP9.TP U1.5 U2.7
N$1: J2.A5 R2-USB1.2
N$2: J2.B5 R2-USB.1
N$3: C_DELAY.1 IC1.5
N$4: MCP73831.1 R1_BAT.2
N$5: C1_BAT1.1 D2.1 IC4.1 IC4.3 Q1.2
N$6: C4.1 D3.2 D4.1
N$7: CHG_LED.C R1_BAT.1
N$8: MCP73831.5 R2_BAT.2
N$10: EPD_C12.2 J1.24
N$12: EPD_C10.2 J1.22
N$14: EPD_C8.2 J1.20
N$15: EPD_C7.2 J1.19
N$16: EPD_C6.2 J1.18
N$20: EPD_C2.2 J1.5
N$21: EPD_C1.2 J1.4
N$22: D7.1 R_CAPACITOR.1
PREVGH: D5.1 EPD_C9.2 J1.21
PREVGL: D4.2 EPD_C11.2 J1.23
RESE: J1.3 Q3.2 R3.2
RESE': R2.2 R3.1 SJ1.2
RESET: C5.1 IC1.1 R_RESET.1 RESET_BUTTON.3 RESET_BUTTON.4 U2.3
RTC_RST: U2.16 U3.4
RX: TP2.TP U2.24
SCK: D9.2 J1.13 J4.P5 R6.1 TP10.TP U1.6 U2.6
SCL: J3.4 R2-PINH.1 SENSOR2.4 U2.20 U3.16 U4.7
SDA: J3.3 R1-PINH.1 SENSOR2.3 U2.19 U3.15 U4.8
SRC: C4.2 D5.2 L1.1 Q3.3
SS_SD: D12.2 J4.P2 R9.1 U2.4
TX: TP1.TP U2.25
USB_D+: D1.1 U2.14
USB_D-: D1.3 U2.13
VBAT [POWER]: C2_BAT.1 MCP73831.3 Q1.3 TP3.TP U4.2 U4.3
VBUS [POWER]: C1_BAT.1 C4_USB.1 C5_USB.1 CHG_LED.A D1.5 D2.2 MCP73831.4 PFMF.050.1.2 Q1.1 R1_PWRUSB.2 TP16.TP
VRTC [POWER]: C8.1 C10_SUPERCAP.2 R_CAPACITOR.2 U3.14
VUSB [POWER]: J2.A4 J2.A9 J2.B4 J2.B9 PFMF.050.1.1

## Tracks (layer width: path | path; a pad name or v marks a point on that pad's centre or on a via)
3V3
  Top 0.3: 5.14,98.97 13.41,107.24 R_RESET.2 20.16,107.24 21.03,106.38 44.41,106.38 45.39,107.35 R_BOOT.2 45.49,104.75 50.56,99.68 IC1.2 51.49,99.68 59.09,107.28 R_CHANGE.2 59.79,107.28 60.7,106.36 TP6.TP | C9.2 5.14,98.97 | 5.14,98.97 6.11,98 6.11,89.82 5.49,89.2 J4.P4 4.48,89.2 4.06,88.78 4.06,73.26 6.48,70.83 6.48,48.96 8.49,46.95 U2.2 | D7.2 78.51,62.37 76.56,60.43 76.56,56.14 70.78,50.36 U3.2 70.78,46.71 R1_PINH1.2 | 131.13,34.12 C3.+ 135.01,34.12 135.51,34.62 C1_BAT2.1 135.71,34.62 136.31,35.22 139.99,35.22 140.57,34.64 IC4.5 140.87,34.64 156.91,18.59 J3.2 165.67,18.17 166.04,18.17 166.2,18.01 166.2,17.18 165.25,16.23 165.25,9.94 158.41,3.1 106.41,3.1 99.08,10.43 73.83,10.43 73.58,10.18 73.58,5.98 69.51,1.9 61.41,1.9 R10.2 | R2_PINH1.2 71.69,45.65 70.76,46.58 R1_PINH1.2 | R1_PINH1.2 70.76,46.78 70.35,47.19 R_CL1.2 | R_CL1.2 61.01,47.29 51.99,56.31 R1.2 40.33,56.31 U1.3 38.83,54.82 38.83,53.84 38.07,53.08 34.15,53.08 U1.7 U1.8 25.54,46.78 9,46.78 8.49,46.26 U2.2 | R_CL1.2 61.01,43.04 Q2.3 | 40.63,22.78 R10.2 | R10.2 R5.2 R6.2 R7.2 R8.2 R9.2 8.49,42.12 U2.2
32KHZ  (via drill 0.3)
  Top 0.127: R2_PINH1.1 77.26,46.98 79.63,49.35 79.63,63.35 76.51,63.35 73.88,60.73 73.88,53.98 73.38,53.98 69.63,50.23 69.63,49.85 U3.1 69.51,49.73 v64.26,49.73 | v57.63,43.1 17.38,43.1 17.38,45.73 U2.9
  Bottom 0.127: v64.26,49.73 v57.63,43.1
DN  (via drill 0.3)
  Top 0.127: v163.76,53.48 162.88,53.48 J2.B7 | v163.76,54.48 162.88,54.48 J2.A7 | v143.38,52.85 144.01,52.85 D1.4
  Bottom 0.127: v163.76,54.48 v163.76,53.48 163.13,52.85 v143.38,52.85
DP  (via drill 0.3)
  Top 0.127: 163.76,54.98 162.88,54.98 J2.B6 | 163.76,54.98 164.26,54.98 164.26,54.35 163.88,53.98 162.88,53.98 J2.A6 | v155.26,53.35 146.51,53.35 146.01,52.85 D1.6 | 163.76,54.98 v163.76,55.1
  Bottom 0.127: v155.26,53.35 162.01,53.35 v163.76,55.1
EPD_3V3
  Top 0.127: C7.1 59.01,31.98 63.13,36.1 66.76,36.1 69.51,38.85 69.51,38.9
  Top 0.3: TP7.TP 81.87,46.86 78.88,43.88 77.05,42.05 L1.2 | L1.2 75.5,41.95 72.45,38.9 69.51,38.9 64,38.9 Q2.2 | L1.2 75.5,29.8 84.54,20.76 84.54,19.71 EPD_C5.2 85.31,12.36 84.93,11.99 84.93,11.55 J1.16 J1.15
EPD_3V3_C  (via drill 0.3)
  Top 0.127: v154.51,21.73 165.38,21.73 165.51,21.69 | v61.01,40.1 60.38,40.73 Q2.1 | v21.76,62.1 20.01,62.1 20.01,63.23 U2.18 | v46.26,37.6 52.88,37.6 TP15.TP
  Top 0.3: 165.51,21.69 166.2,21.01 | R_CL1.1 60.25,46.65 Q2.1 56.96,37.47 TP15.TP
  Bottom 0.127: v154.51,21.73 141.38,21.73 136.38,16.73 92.38,16.73 69.01,40.1 v61.01,40.1 | v46.26,37.6 v21.76,62.1
EPD_BUSY  (via drill 0.3)
  Top 0.127: v81.01,12.73 81.26,12.73 81.26,11.48 J1.9 | U2.26 9.88,63.35 9.88,63.73 v10.63,64.48 10.63,66.48 8.51,68.6 8.01,68.6 8.01,71.48 TP11.TP
  Bottom 0.127: v81.01,12.73 79.63,12.73 79.26,12.35 72.13,12.35 20.01,64.48 v10.63,64.48
EPD_CS  (via drill 0.3)
  Top 0.127: 66.51,6.23 75.51,15.23 82.76,15.23 82.76,11.48 J1.12 | 66.51,6.23 66.51,3.48 TP12.TP | v20.13,44.6 20.01,44.6 20.01,45.73 U2.11 | v29.51,30.6 30.13,29.98 30.26,29.98 D11.2 30.38,29.85 30.38,24.1 R8.1 30.38,23.98 30.88,23.48 41.26,23.48 41.26,22.73 53.76,10.23 62.51,10.23 66.51,6.23
  Bottom 0.127: v20.13,44.6 20.13,39.98 v29.51,30.6
EPD_DC  (via drill 0.3)
  Top 0.127: v71.76,10.85 82.26,10.85 82.26,11.35 J1.11 | U2.5 12.38,45.73 12.38,45.35 v15.76,41.98 42.76,41.98 v43.38,42.6 | v64.01,64.98 62.88,64.98 62.13,65.73 TP13.TP
  Bottom 0.127: v71.76,10.85 46.88,10.85 v15.76,41.98 | v64.01,64.98 64.01,63.23 v43.38,42.6
EPD_RST  (via drill 0.3)
  Top 0.127: v75.63,14.73 75.76,14.85 81.76,14.85 81.76,11.48 J1.10 | v26.13,66.98 TP14.TP 25.13,67.85 16.13,67.85 16.13,63.35 U2.21
  Bottom 0.127: v75.63,14.73 70.63,14.73 26.13,59.23 v26.13,66.98
FLASH_CS  (via drill 0.3)
  Top 0.127: R7.1 32.88,24.1 32.88,29.85 D10.2 32.88,29.98 v31.76,31.1 | v24.63,46.23 32.88,46.23 40.13,53.48 U1.1 | v22.13,44.6 21.26,45.48 21.26,45.73 U2.12
  Bottom 0.127: v24.63,46.23 23.76,46.23 v22.13,44.6 31.76,34.98 v31.76,31.1
GDR  (via drill 0.3)
  Top 0.127: v77.76,13.98 77.76,11.48 J1.2 | v64.76,26.98 64.76,28.98 R4.2 64.76,29.1 65.88,29.1 65.88,34.73 Q3.1
  Bottom 0.127: v64.76,26.98 v77.76,13.98
GND  (via drill 0.3)
  Top 0.127: C10.2 68.26,107.35 68.13,107.23 65.76,107.23 CHANGE_BUTTON.2 65.63,107.23 62.26,107.23 CHANGE_BUTTON.1 62.13,107.23 61.51,107.85 53.88,107.85 53.38,107.35 C6.2 53.26,107.23 53.13,107.1 50.88,107.1 | 50.88,107.1 50.88,100.73 IC1.3 51.01,100.73 v51.76,100.73 | 50.88,107.1 50.76,107.1 BOOT_BUTTON.2 | v53.26,100.73 53.26,99.98 C_DELAY.2 | 50.88,107.1 BOOT_BUTTON.2 | BOOT_BUTTON.2 50.63,107.23 47.26,107.23 BOOT_BUTTON.1 47.13,107.23 46.38,107.98 45.01,107.98 44.26,107.23 27.51,107.23 C5.2 27.38,107.23 25.76,107.23 RESET_BUTTON.2 25.63,107.23 22.26,107.23 RESET_BUTTON.1 22.13,107.23 21.51,107.85 12.63,107.85 5.13,100.35 C9.1 5.01,100.23 2.26,97.48 2.26,94.35 J4.G4 2.26,94.23 2.26,93.48 | J4.G1 15.51,84.1 17.26,85.85 17.26,89.73 15.51,89.73 J4.G2 15.38,89.73 v6.63,89.73 | 3.88,91.85 4.51,91.85 4.88,91.48 J4.P6 | 2.26,93.48 3.88,91.85 | 2.26,93.48 1.26,93.48 1.26,81.1 J4.G3 | 3.88,91.85 v3.76,91.73 | v155.26,51.48 155.26,50.73 C5_USB.2 | J2.A1 162.76,50.73 162.13,50.73 v161.88,50.48 156.38,44.98 140.51,44.98 136.26,49.23 C4_USB.2 136.13,49.23 129.88,42.98 | J2.B12 162.76,51.1 162.76,50.85 J2.A1 | J2.A1 162.88,50.73 163.26,50.73 163.26,49.1 J2.MP3 163.38,49.1 167.26,49.1 J2.MP1 167.38,49.1 167.38,59.23 J2.MP2 167.26,59.35 163.38,59.35 J2.MP4 | J2.B1 162.76,57.35 162.76,57.48 J2.A12 162.88,57.6 162.88,59.23 163.26,59.23 J2.MP4 | R1_PWRUSB.1 131.63,64.85 132.38,65.6 157.01,65.6 163.26,59.35 J2.MP4 | 145.63,16.23 145.63,16.98 C1.2 | 145.63,16.23 145.63,14.6 | 145.63,14.6 C2.2 | 145.63,14.6 148.51,14.6 SENSOR2.5 | 145.63,16.23 148.51,16.23 SENSOR2.7 148.63,16.23 148.88,16.23 149.38,16.73
  Top 0.127: 149.38,16.73 151.38,16.73 151.51,16.85 SENSOR2.1 151.63,16.98 151.88,17.23 164.88,17.23 165.13,17.48 J3.1 | IC4.2 137.88,33.6 135.88,33.6 135.63,33.35 C1_BAT2.2 135.63,33.23 135.76,33.23 135.76,31.1 | 135.76,31.1 135.76,26.85 C1_BAT1.2 135.88,26.73 137.01,25.6 149.38,25.6 149.38,16.73 | 129.88,42.98 129.88,31.23 131.13,31.23 C3.- 131.26,31.1 135.76,31.1 | 78.26,14.48 76.88,14.48 76.38,13.98 J1.MP1 | 78.26,14.48 78.63,14.48 80.76,12.35 80.76,11.48 J1.8 | EPD_C7.1 83.76,20.35 82.26,20.35 EPD_C1.1 82.13,20.35 80.76,20.35 EPD_C2.1 80.63,20.35 79.13,20.35 EPD_C8.1 79.01,20.35 78.01,21.35 75.26,21.35 75.26,19.73 | 75.26,19.73 75.88,19.1 EPD_C9.1 76.01,18.98 77.38,18.98 EPD_C10.1 v78.26,18.23 | v78.26,14.35 78.26,14.48 | D12.1 27.88,31.48 30.26,31.48 D11.1 30.38,31.48 30.51,31.6 32.76,31.6 32.88,31.48 D10.1 33.01,31.48 35.38,31.48 D9.1 35.51,31.48 37.88,31.48 D8.1 38.01,31.48 40.51,31.48 D6.1 40.63,31.48 54.13,31.48 | 54.13,11.6 54.13,11.35 54.88,10.6 57.26,10.6 58.13,11.48 R2.1 58.26,11.6 58.88,11.6 58.88,14.48 60.51,16.1 71.63,16.1 75.26,19.73 | R4.1 63.38,29.1 60.51,29.1 57.76,31.85 C7.2 57.63,31.85 54.13,31.85 54.13,31.48 | 54.13,31.48 54.13,11.6 | 54.13,11.6 SJ1.1 | TP4.TP 8.51,4.1 4.38,4.1 TP5.TP 4.26,4.1 4.01,4.1 4.01,42.6 7.13,45.73 U2.1 7.26,45.85 v7.26,47.35 | 36.26,55.6 38.38,55.6 40.13,57.35 U1.4 40.26,57.48 41.01,58.23 68.76,58.23 70.26,56.73 73.01,56.73 73.38,57.1 73.38,58.98 U3.13 73.38,59.1 73.38,63.73 79.63,63.73 87.63,55.73 87.63,54.85 C10_SUPERCAP.1 87.76,54.73 88.38,54.73 88.38,50.98 C8.2 | 11.76,51.85 11.76,52.98 U2.29_2
  Top 0.127: 13.01,51.85 13.01,52.98 U2.29_5 | 11.76,51.85 12.88,51.85 U2.29_4 13.01,51.85 | 11.76,51.85 U2.29_1 11.63,51.73 v10.13,50.23 | 13.01,51.85 14.13,51.85 U2.29_7 14.26,51.85 14.26,52.98 U2.29_8 14.26,53.1 14.26,54.23 U2.29_9 | U2.29_9 14.13,54.35 13.01,54.35 U2.29_6 12.88,54.35 11.76,54.35 U2.29_3 11.63,54.35 7.26,54.35 7.26,63.23 U2.28 | 36.26,55.6 35.26,56.6 16.51,56.6 14.26,54.35 U2.29_9 | 36.26,55.6 U1.9 | J1.17 85.38,11.35 85.38,10.85 89.13,10.85 89.76,11.48 89.76,13.85 J1.MP2 89.88,13.98 89.88,17.6 90.88,18.6 90.88,20.85 89.26,20.85 88.63,20.23 | 85.63,20.23 86.63,20.23 EPD_C11.1 86.76,20.23 88.13,20.23 EPD_C12.1 | 85.63,20.23 85.38,20.23 EPD_C5.1 85.63,20.23 | 88.63,20.23 89.76,19.1 EPD_C6.1 | 88.63,20.23 88.26,20.23 EPD_C12.1 | 82.38,26.85 82.38,23.48 85.63,20.23 | 82.38,26.85 82.38,36.23 80.26,38.35 79.63,38.35 79.63,43.1 D3.1 79.63,43.23 82.01,45.6 93.26,45.6 94.01,46.35 | 88.63,20.23 EPD_C12.1 | D1.2 145.01,55.35 145.01,57.1 140.38,57.1 R2-USB1.1 140.26,57.1 139.88,56.73 137.76,56.73 R2-USB.2 136.76,55.73 136.38,55.35 105.01,55.35 104.63,54.98 104.63,51.48 U4.1 104.63,51.35 104.88,51.35 105.51,50.73 U4.9 | 105.38,50.48 105.51,50.6 U4.9 | 105.38,50.48 104.88,49.98 104.63,49.98 U4.4 104.51,49.98 104.13,49.98 | 105.38,50.48 106.51,50.48 U4.6 | 105.38,50.48 U4.9 | C2_BAT.2 115.51,57.85 114.26,59.1 112.38,59.1 C1_BAT.2 112.26,59.23 109.01,59.23 R2_BAT.1 108.88,59.23 104.76,59.23 104.76,57.6 MCP73831.2 104.63,57.48 104.63,57.1 104.13,56.6 103.38,56.6 103.38,50.73 104.13,49.98 | 104.13,49.98 89.38,49.98 88.51,50.85 C8.2 | 94.01,46.35 94.01,48.98 85.13,48.98 84.76,49.35 84.76,50.85 88.38,50.85 C8.2
  Top 0.127: 82.38,26.85 v81.63,26.85 | 129.88,42.98 126.51,46.35 94.01,46.35
  Bottom 0.127: v51.76,100.73 v53.26,100.73 | v6.63,89.73 5.76,89.73 4.38,91.1 | v3.76,91.73 4.38,91.1 | v155.26,51.48 160.88,51.48 v161.88,50.48 | v78.26,14.35 v78.26,18.23 78.26,18.73 76.26,20.73 76.26,23.48 79.63,26.85 v81.63,26.85 | v10.13,50.23 9.01,49.1 | 9.01,49.1 v7.26,47.35 | 4.38,91.1 3.38,90.1 3.38,66.98 9.01,61.35 9.01,49.1
GPIO8  (via drill 0.3)
  Top 0.127: v42.51,56.85 43.26,57.6 R1.1 | v41.88,44.1 20.01,44.1 18.76,45.35 18.76,45.73 U2.10
  Bottom 0.127: v42.51,56.85 42.51,44.73 v41.88,44.1
I2C_PW  (via drill 0.3)
  Top 0.127: 154.51,16.1 154.51,16.48 R1-PINH.2 | 154.51,16.1 R2-PINH.2 | 149.38,15.73 150.88,15.73 151.26,16.1 151.51,16.1 SENSOR2.2 151.63,16.1 154.51,16.1 | 149.38,15.73 148.88,15.73 148.63,15.48 SENSOR2.6 | 144.38,14.1 144.38,16.98 C1.1 | SENSOR2.8 148.51,16.98 147.76,17.73 145.01,17.73 144.38,17.1 C1.1 | v103.01,50.48 87.13,66.35 72.63,66.35 70.76,64.48 61.63,64.48 60.76,65.35 21.26,65.35 21.26,63.35 U2.17 | v136.26,17.23 136.38,17.1 144.26,17.1 C1.1 | 149.38,15.73 149.38,13.35 145.13,13.35 144.38,14.1 | 144.38,14.1 C2.1
  Bottom 0.127: v136.26,17.23 v103.01,50.48
INT_RTC  (via drill 0.3)
  Top 0.127: 72.13,47.48 72.13,49.73 U3.3 | 72.13,47.48 72.13,46.73 R1_PINH1.1 | v16.88,44.6 16.13,44.6 16.13,45.73 U2.8 | v18.88,44.6 19.88,43.6 v58.76,43.6 | 72.13,47.48 v71.51,47.48 | TP17.TP 84.38,66.85 v81.26,66.85
  Bottom 0.127: v18.88,44.6 v16.88,44.6 | v58.76,43.6 62.63,47.48 v71.51,47.48 71.51,57.1 v81.26,66.85
IO/BOOT  (via drill 0.3)
  Top 0.127: C6.1 53.26,108.6 50.76,108.6 BOOT_BUTTON.3 50.63,108.73 47.26,108.73 BOOT_BUTTON.4 47.13,108.73 45.51,108.73 R_BOOT.1 45.38,108.6 45.01,108.6 v44.63,108.23 | v26.63,64.85 25.26,64.85 23.76,63.35 U2.15
  Bottom 0.127: v26.63,64.85 26.63,90.23 v44.63,108.23
IO/CHANGE  (via drill 0.3)
  Top 0.127: C10.1 68.26,108.73 65.76,108.73 CHANGE_BUTTON.3 65.63,108.73 62.26,108.73 CHANGE_BUTTON.4 62.13,108.6 59.76,108.6 R_CHANGE.1 59.63,108.48 v58.88,108.48 | v48.26,97.85 20.26,69.85 13.63,69.85 13.63,63.35 U2.23
  Bottom 0.127: v58.88,108.48 v48.26,97.85
MISO  (via drill 0.3)
  Top 0.127: R10.1 40.51,24.1 40.51,29.85 D6.2 40.51,29.98 v39.76,30.73 | v36.26,45.48 41.01,45.48 41.01,54.1 40.26,54.85 U1.2 | v8.38,66.73 8.38,63.35 U2.27 8.51,63.23 8.51,62.98 10.63,60.85 20.88,60.85 v21.01,60.73 | v4.63,70.48 3.63,71.48 TP8.TP | v3.88,92.48 5.01,92.48 J4.P7
  Bottom 0.127: v39.76,30.73 36.26,34.23 v36.26,45.48 v21.01,60.73 | v4.63,70.48 7.13,67.98 | 7.13,67.98 v8.38,66.73 | v3.88,92.48 4.51,92.48 7.13,89.85 7.13,67.98
MOSI  (via drill 0.3)
  Top 0.127: v60.63,15.6 83.76,15.6 83.76,11.48 J1.14 | v38.88,23.98 38.01,23.98 R5.1 38.01,24.1 38.01,29.85 D8.2 37.88,29.98 37.13,30.73 v33.76,30.73 | v24.01,57.1 24.38,57.1 | 24.38,57.1 32.01,57.1 32.26,57.35 U1.5 | U2.7 14.88,45.73 14.88,45.35 v15.63,44.6 15.76,44.6 v15.76,42.73 | v21.76,72.1 6.26,87.6 5.63,87.6 5.13,88.1 J4.P3 | 24.38,57.1 v24.38,60.73 | v11.38,38.35 10.73,37.71 10.73,37.25 10.62,37.14 10.2,37.14 TP9.TP
  Bottom 0.127: v60.63,15.6 47.26,15.6 v38.88,23.98 | v24.01,57.1 24.01,52.98 v15.63,44.6 | v21.76,72.1 21.76,63.35 v24.38,60.73 | v11.38,38.35 v15.76,42.73 28.38,30.1 31.38,30.1 32.01,30.73 v33.76,30.73
N$1  (via drill 0.3)
  Top 0.127: v141.26,55.35 140.88,55.35 140.38,55.85 R2-USB1.2 | v163.76,52.35 163.76,52.85 162.88,52.85 J2.A5
  Bottom 0.127: v141.26,55.35 141.26,54.35 143.26,52.35 v163.76,52.35
N$2  (via drill 0.3)
  Top 0.127: v139.51,57.23 136.88,57.23 R2-USB.1 | v163.76,56.23 163.51,55.98 162.88,55.98 J2.B5
  Bottom 0.127: v139.51,57.23 162.76,57.23 v163.76,56.23
N$3
  Top 0.127: C_DELAY.1 53.13,98.6 52.76,98.23 48.51,98.23 48.13,98.6 IC1.5
N$4
  Top 0.127: R1_BAT.2 100.01,57.98 100.38,57.6 103.76,57.6 MCP73831.1
N$5  (via drill 0.3)
  Top 0.127: D2.1 129.63,60.1 127.01,60.1 125.76,58.85 Q1.2 125.76,58.73 v127.13,57.35 | C1_BAT1.1 137.13,26.85 137.13,32.73 137.88,32.73 IC4.3 138.01,32.85 138.63,32.85 138.63,34.1 138.51,34.23 138.38,34.23 138.01,34.6 IC4.1 137.88,34.6 v137.01,34.6
  Bottom 0.127: v127.13,57.35 127.13,44.48 v137.01,34.6
N$6
  Top 0.127: C4.1 89.38,40.48 86.63,37.73 83.26,37.73 D4.1 83.13,37.73 83.13,43.1 D3.2
N$7
  Top 0.127: CHG_LED.C 100.51,63.48 100.51,59.48 100.01,59.48 R1_BAT.1
N$8
  Top 0.127: R2_BAT.2 108.88,60.6 105.38,64.1 101.63,64.1 101.51,63.98 101.51,60.23 103.76,60.23 MCP73831.5
N$9
  pour Top: 73.96,10.07 73.99,10.08 92.22,10.08 92.25,10.07 92.27,10.05 92.28,10.02 92.28,0.08 170.13,0.08 170.13,67.13 92.19,67.13 92.16,67.14 92.14,67.16 92.13,67.19 92.13,111.13 69.38,111.13 69.38,109.49 69.37,109.46 69.35,109.44 69.32,109.43 19.49,109.43 19.46,109.44 19.44,109.46 19.43,109.49 19.43,111.13 0.08,111.13 0.08,63.88 6.02,63.88 6.05,63.87 6.07,63.85 6.08,63.82 6.08,45.79 6.07,45.76 6.05,45.74 6.02,45.73 0.08,45.73 0.08,0.08 73.93,0.08 73.93,10.02 73.94,10.05
N$10  (via drill 0.3)
  Top 0.127: v88.88,17.35 88.88,11.48 J1.24 | v89.01,18.35 88.51,18.85 88.26,18.85 EPD_C12.2
  Bottom 0.127: v88.88,17.35 88.88,18.23 v89.01,18.35
N$11
  pour Bottom: 73.96,10.07 73.99,10.08 92.22,10.08 92.25,10.07 92.27,10.05 92.28,10.02 92.28,0.08 170.13,0.08 170.13,67.13 92.19,67.13 92.16,67.14 92.14,67.16 92.13,67.19 92.13,111.13 69.38,111.13 69.38,109.49 69.37,109.46 69.35,109.44 69.32,109.43 19.49,109.43 19.46,109.44 19.44,109.46 19.43,109.49 19.43,111.13 0.08,111.13 0.08,63.88 6.02,63.88 6.05,63.87 6.07,63.85 6.08,63.82 6.08,45.79 6.07,45.76 6.05,45.74 6.02,45.73 0.08,45.73 0.08,0.08 73.93,0.08 73.93,10.02 73.94,10.05
N$12  (via drill 0.3)
  Top 0.127: v87.76,12.35 87.76,11.48 J1.22 | v78.26,19.73 77.76,20.23 77.51,20.23 EPD_C10.2
  Bottom 0.127: v87.76,12.35 80.01,20.1 78.63,20.1 v78.26,19.73
N$14  (via drill 0.3)
  Top 0.127: v86.76,12.23 86.76,11.48 J1.20 | v81.01,17.98 79.76,17.98 79.13,18.6 79.13,18.98 EPD_C8.2
  Bottom 0.127: v81.01,17.98 v86.76,12.23
N$15  (via drill 0.3)
  Top 0.127: v86.26,16.6 86.26,11.48 J1.19 | v84.51,18.35 83.88,18.98 EPD_C7.2
  Bottom 0.127: v84.51,18.35 v86.26,16.6
N$16
  Top 0.127: J1.18 85.76,11.48 85.76,17.85 89.76,17.85 90.51,18.6 90.51,20.23 89.88,20.23 EPD_C6.2
N$20  (via drill 0.3)
  Top 0.127: v79.38,13.1 79.38,11.48 J1.5 | v79.88,18.48 80.38,18.98 80.63,18.98 EPD_C2.2
  Bottom 0.127: v79.38,13.1 79.38,17.98 v79.88,18.48
N$21  (via drill 0.3)
  Top 0.127: v78.88,13.6 78.88,11.48 J1.4 | v79.88,19.6 81.63,19.6 82.13,19.1 EPD_C1.2
  Bottom 0.127: v78.88,13.6 78.88,18.6 v79.88,19.6
N$22  (via drill 0.3)
  Top 0.127: v72.88,64.85 72.26,64.85 72.01,64.6 R_CAPACITOR.1 | v77.63,64.85 78.01,64.48 78.51,64.48 D7.1
  Bottom 0.127: v77.63,64.85 v72.88,64.85
PREVGH  (via drill 0.3)
  Top 0.127: v87.26,13.48 87.26,11.48 J1.21 | v76.76,20.85 76.26,20.35 76.01,20.35 EPD_C9.2 | v79.76,26.35 79.76,32.6 D5.1
  Bottom 0.127: v87.26,13.48 87.01,13.48 79.76,20.73 | 79.76,20.73 79.63,20.85 v76.76,20.85 | 79.76,20.73 v79.76,26.35
PREVGL  (via drill 0.3)
  Top 0.127: v88.26,17.35 88.26,11.48 J1.23 | v87.51,18.35 87.01,18.85 86.76,18.85 EPD_C11.2 | v81.13,24.98 81.13,32.48 80.38,33.23 79.76,33.23 79.76,37.6 D4.2
  Bottom 0.127: v88.26,17.35 88.26,17.6 v87.51,18.35 81.13,24.73 v81.13,24.98
RESE  (via drill 0.3)
  Top 0.127: v78.26,12.85 78.26,11.48 J1.3 | v68.13,22.98 68.13,28.98 R3.2 68.01,29.1 67.38,29.73 67.26,29.73 67.26,34.73 Q3.2
  Bottom 0.127: v68.13,22.98 v78.26,12.85
RESE'
  Top 0.127: SJ1.2 57.01,11.6 58.13,12.73 R2.2 58.26,12.85 58.26,14.23 63.38,19.35 66.76,19.35 66.76,28.98 R3.1
RESET  (via drill 0.3)
  Top 0.127: R_RESET.1 20.13,108.6 22.13,108.6 RESET_BUTTON.4 22.26,108.73 25.63,108.73 RESET_BUTTON.3 25.76,108.6 27.26,108.6 27.38,108.48 C5.1 27.51,108.35 27.63,108.35 v28.26,107.73 | v35.88,100.1 47.88,100.1 48.88,99.1 50.51,99.1 50.88,98.73 IC1.1 | v11.51,44.1 9.88,44.1 9.88,45.73 U2.3
  Bottom 0.127: v28.26,107.73 v35.88,100.1 10.13,74.35 10.13,64.35 11.51,62.98 v11.51,44.1
RTC_RST  (via drill 0.3)
  Top 0.127: v71.38,62.23 22.51,62.23 22.51,63.23 U2.16 | v76.01,62.23 76.76,62.98 79.13,62.98 79.26,62.85 79.26,51.1 74.26,51.1 73.38,50.23 73.38,49.85 U3.4
  Bottom 0.127: v76.01,62.23 v71.38,62.23
RX
  Top 0.127: U2.24 12.38,63.35 12.38,70.23 16.13,70.23 17.38,71.48 TP2.TP
SCK  (via drill 0.3)
  Top 0.127: v83.26,12.23 83.26,11.48 J1.13 | v36.26,23.98 35.51,23.98 R6.1 35.51,24.1 35.51,29.85 D9.2 | v29.51,51.48 29.51,53.35 32.26,56.1 U1.6 | v3.88,89.85 4.63,89.85 5.01,90.23 J4.P5 | v13.76,44.6 13.63,44.6 13.63,45.73 U2.6 | v6.51,38.73 6.51,37.23 TP10.TP
  Bottom 0.127: v83.26,12.23 79.51,12.23 79.26,11.98 48.26,11.98 v36.26,23.98 36.26,30.85 29.51,37.6 29.51,46.73 | 29.51,46.73 v29.51,51.48 | v3.88,89.85 3.88,66.85 9.38,61.35 9.38,51.6 10.63,50.35 10.63,44.85 10.51,44.73 10.51,44.48 11.38,43.6 | 13.76,43.6 18.51,43.6 21.63,46.73 29.51,46.73 | 13.76,43.6 11.38,43.6 | 13.76,43.6 v13.76,44.6 | 11.38,43.6 v6.51,38.73
SCL  (via drill 0.3)
  Top 0.127: SENSOR2.4 151.63,14.48 152.26,13.85 155.01,13.85 155.76,14.6 R2-PINH.1 155.88,14.6 v156.51,15.23 | v161.38,20.1 164.76,20.1 165.13,20.48 J3.4 | v107.26,50.98 106.63,50.98 U4.7 | v72.26,57.23 72.01,57.48 70.76,57.48 69.63,58.6 69.63,58.98 U3.16 69.51,59.1 67.38,61.23 17.38,61.23 17.38,63.23 U2.20
  Bottom 0.127: v156.51,15.23 159.13,17.85 | 159.13,17.85 v161.38,20.1 | v72.26,57.23 78.51,50.98 v107.26,50.98 124.13,34.1 142.88,34.1 159.13,17.85
SDA  (via drill 0.3)
  Top 0.127: 157.01,15.35 155.88,16.48 R1-PINH.1 | 157.01,15.35 157.01,13.48 151.51,13.48 150.76,14.23 150.76,15.35 151.51,15.35 SENSOR2.3 | v161.01,19.1 164.76,19.1 165.13,19.48 J3.3 | 157.01,15.35 v157.26,15.35 | v105.13,51.85 106.13,51.85 106.51,51.48 U4.8 | v72.88,57.23 72.26,57.85 71.63,57.85 70.88,58.6 70.88,58.98 U3.15 70.76,59.1 70.76,59.48 68.63,61.6 18.76,61.6 18.76,63.23 U2.19
  Bottom 0.127: v157.26,15.35 v161.01,19.1 161.88,19.98 161.88,23.23 127.26,57.85 111.13,57.85 v105.13,51.85 78.26,51.85 v72.88,57.23
SRC  (via drill 0.3)
  Top 0.127: 70.88,42.1 61.51,42.1 61.51,40.23 63.26,38.48 65.01,38.48 66.51,36.98 Q3.3 | 83.26,33.1 89.38,39.23 C4.2 | 83.26,33.1 83.26,32.73 D5.2 | 70.88,42.1 71.13,41.85 v74.51,41.85 | 83.26,33.1 v82.88,33.48 | 70.88,42.1 L1.1
  Bottom 0.127: v82.88,33.48 v74.51,41.85
SS_SD  (via drill 0.3)
  Top 0.127: R9.1 27.88,24.1 27.88,29.85 D12.2 27.76,29.98 16.26,41.48 14.76,41.48 11.63,44.6 v11.01,44.6 11.01,45.73 U2.4 | v9.76,82.73 5.51,86.98 J4.P2
  Bottom 0.127: v9.76,82.73 9.76,51.6 11.01,50.35 v11.01,44.6
TX
  Top 0.127: U2.25 11.13,63.35 11.13,71.48 14.01,71.48 TP1.TP
USB_D+  (via drill 0.3)
  Top 0.127: v85.26,49.48 106.88,49.48 111.01,53.6 145.88,53.6 145.88,55.23 D1.1 | v59.63,43.85 58.51,44.98 24.51,44.98 23.76,45.73 U2.14
  Bottom 0.127: v85.26,49.48 74.13,49.48 68.51,43.85 v59.63,43.85
USB_D-  (via drill 0.3)
  Top 0.127: v105.13,54.85 143.63,54.85 144.01,55.23 D1.3 | v42.88,44.48 42.76,44.6 23.38,44.6 22.51,45.48 22.51,45.73 U2.13
  Bottom 0.127: v105.13,54.85 93.88,54.85 81.38,67.35 65.76,67.35 v42.88,44.48
VBAT
  Top 0.3: U4.3 U4.2 103.99,50.92 103.81,51.1 103.81,55.32 105.28,56.79 105.28,57.1 MCP73831.3 114.7,57.5 115.16,57.05 116.2,57.05 C2_BAT.1 123.58,57.77 Q1.3 124.96,56.41 124.96,56.32 125.13,56.16 128.98,56.16 130.61,57.79 140.14,57.79 TP3.TP
VBUS
  Top 0.3: CHG_LED.A 105.54,60.1 MCP73831.4 108.2,60.1 108.37,59.94 109.5,59.94 110.09,60.52 C1_BAT.1 122.1,60.52 124.32,58.3 124.32,58.21 Q1.1 128.41,56.84 D2.2 130.43,58.85 130.43,60.74 130.23,60.94 R1_PWRUSB.2 130.33,64.8 131.06,64.08 143.87,64.08 145.03,65.24 148.32,65.24 148.32,65.04 TP16.TP 155.88,57.47 155.88,50.26 155.71,50.09 155.71,49.3 155.28,49.3 C5_USB.1 154.19,48.46 PFMF.050.1.2 145.59,51.93 145.57,51.93 145.04,52.46 D1.5 144.66,52.43 144.66,52.09 143.17,50.59 C4_USB.1
VRTC
  Top 0.3: C8.1 89.93,51.13 C10_SUPERCAP.2 78.67,66 74.76,66 R_CAPACITOR.2 72.01,59.12 U3.14
VUSB
  Top 0.127: J2.A4 162.76,51.73 162.67,51.81 | J2.A9 162.76,56.6 162.76,56.48 J2.B4
  Top 0.3: 162.11,51.57 162.42,51.57 162.67,51.81 J2.B9 | PFMF.050.1.1 156.48,45.94 162.11,51.57 | 162.11,51.57 162.11,52.02 161.95,52.18 161.95,56.21 162.11,56.37 162.42,56.37 J2.A9

## Text on the board
tPlace: 3V3 | EPD BUSY | TX | INT RTC | RX | MISO | EDP RST | EPD DC | VBUS | VBAT | EPD 3V3 | SCK | EPD 3V3 C | MOSI | EDP CS | GND | GND